# Altium PCB PCB.PcbDoc
Units mil, origin at the board's own origin, x right, y up, seen from the top; angles counter-clockwise.
Board outline 6000 x 4000 mil, 2 copper layers (Top Layer, Bottom Layer); 29 components, 23 nets, 105 pads, 0 vias.
Unrouted connection lines stored in the file: 68.
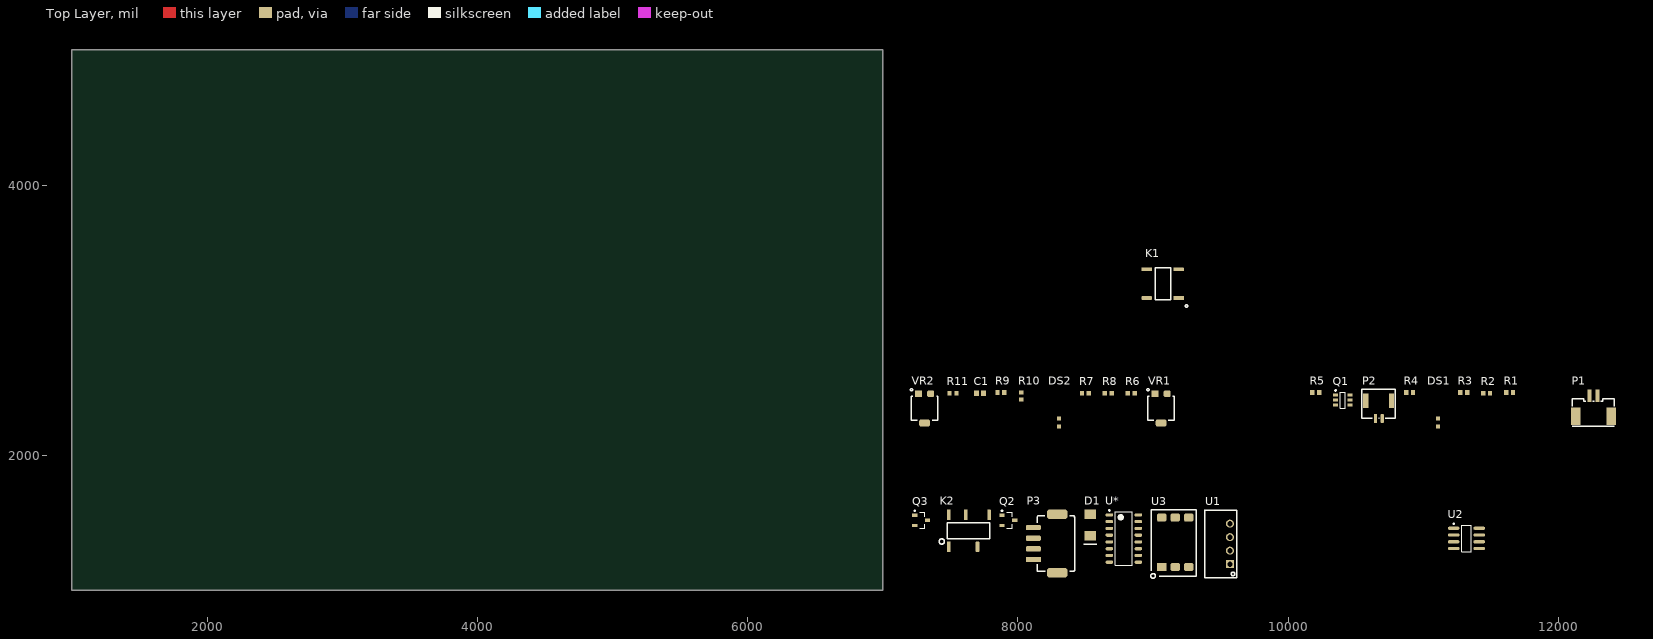
[diagram p0: Top Layer view]
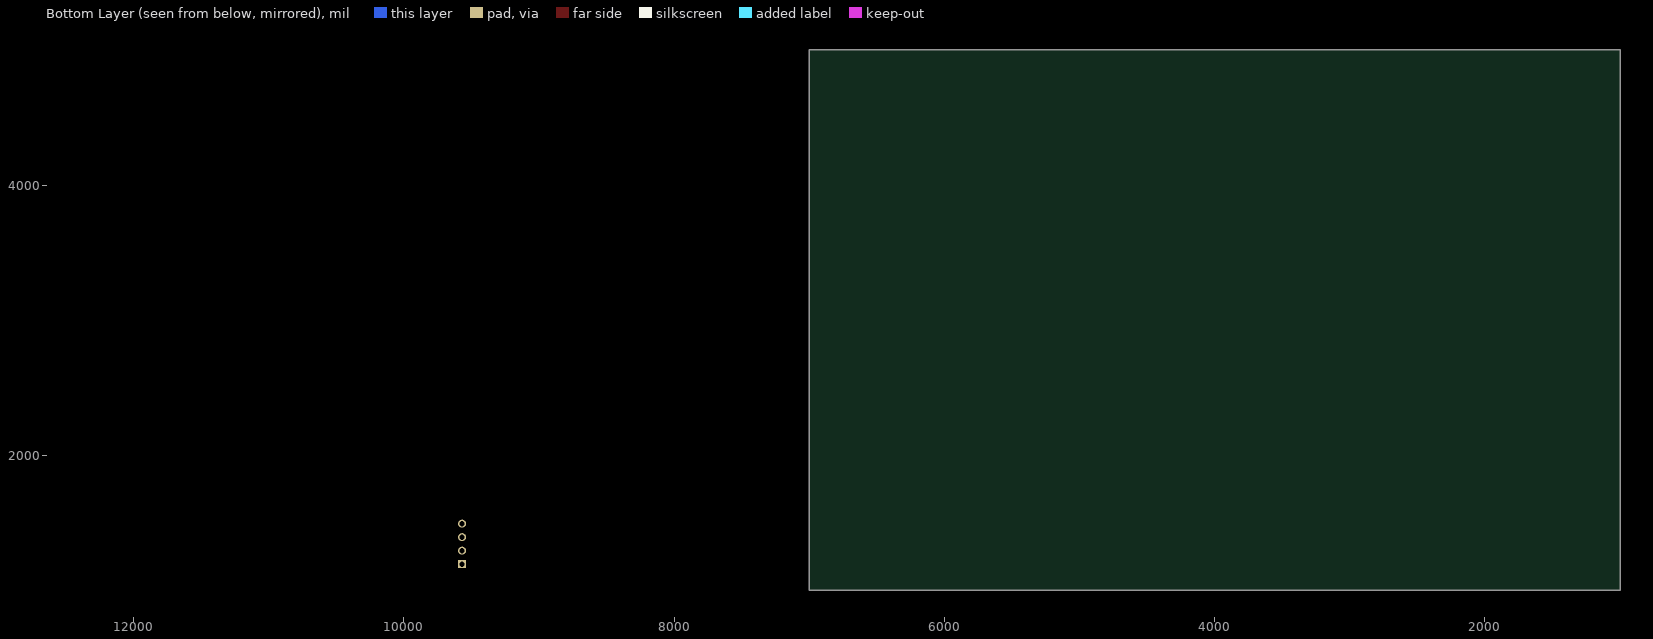
[diagram p1: Bottom Layer view, seen from below]

## Layer stack, top to bottom
Top Solder: solder mask 0.4, Solder Resist, Dk 3.5
Top Layer: signal copper 1.4
Dielectric 1: dielectric 12.6, FR-4, Dk 4.8
Bottom Layer: signal copper 1.4
Bottom Solder: solder mask 0.4, Solder Resist, Dk 3.5

## Board outline
1000,1000 7000,1000 7000,5000 1000,5000

## Design rules (kind name [scope] priority, off if disabled: settings)
Clearance [All] p1: gap=10
PolygonConnect [All] p1: connectstyle=Relief reliefconductorwidth=10 reliefentries=4 polygonreliefangle="90 Angle" airgapwidth=10
RoomDefinition Sheet1 [InComponentClass('Sheet1')] p1: confinementstyle=ConfineIn formatcopy=TRUE lockcomponents=FALSE outline 7200.28,1078.82 12440.28,1078.82 12440.28,2598.82 7200.28,2598.82
RoutingVias [All] p1: holewidth=28 width=50 viastyle="Through Hole" minholewidth=28 minwidth=50 maxholewidth=28 maxwidth=50
SolderMaskExpansion [All] p1: expansion=4
Width [All] p1: maxlimit=10 minlimit=10 preferedwidth=10
30 further rules are at their usual default settings.

## Components (designator, comment, footprint, x,y, rotation, side; value= is the part's Value field where it differs from the comment)
C1 "2.2uF" 0603 7720.28,2458.82 r0 top
D1 "Zener Diode" "DO-214AA Diode" 8535.28,1403.82 r90 top
DS1 "LED_G" LED_0603 11110.28,2213.82 r90 top
DS2 "LED_R" LED_0603 8305.28,2213.82 r90 top
K1 "Relay-SPST" RELAY-SPST 9190.28,3163.82 r90 top
K2 "Relay-SPDT" RELAY_SPDT 7615.28,1558.82 r0 top
P1 "12V Power In" WM9811CT-ND 11975.28,2248.82 r0 top
P2 "To Main Relay" WM4780CT-ND 10660.28,2358.82 r0 top
P3 "4 Position Clik-Mate HV Surface Mount" WM2282CT-ND 8115.28,1228.82 r90 top
Q1 "MOSFET-P" P-MOSFET 10405.28,2408.82 r0 top
Q2 "MOSFET-N" "N-CH MOSFET SOT-23" 7930.28,1518.82 r0 top
Q3 "MOSFET-N" "N-CH MOSFET SOT-23" 7285.28,1518.82 r0 top
R1 "10K" RES_0603 11640.28,2463.82 r0 top
R2 "RES SMD 6.2K OHM 5% 1/10W 0603" RES_0603 11470.28,2458.82 r0 top
R3 "10K" RES_0603 11300.28,2463.82 r0 top
R4 "820 Ohm" RES_0603 10900.28,2463.82 r0 top
R5 "10K" RES_0603 10205.28,2463.82 r0 top
R6 "470K" RES_0603 8840.28,2458.82 r0 top
R7 "33K" RES_0603 8500.28,2458.82 r0 top
R8 "470K" RES_0603 8670.28,2458.82 r0 top
R9 "820 Ohm" RES_0603 7875.28,2463.82 r0 top
R10 "33K" RES_0603 8025.28,2438.82 r90 top
R11 "33K" RES_0603 7520.28,2458.82 r0 top
U1 "RM-1212S DCDC" RM-1212S 9570.28,1193.82 r90 top
U2 "LM311" SOIC8 11320.28,1383.82 r0 top
U3 "H11L1S" H11LS 9265.28,1173.82 r90 top
U* "CD4043B SR Latch" CD4043BDR-16SOIC 8785.28,1383.82 r0 top
VR1 "20k 0.25W Pot" "20K POT" 9060.28,2238.82 r90 top
VR2 "20k 0.25W Pot" "20K POT" 7310.28,2238.82 r90 top

## Footprints (in the part's own frame and the unit in brackets; to place one, negate y for a bottom-side part, rotate by r counter-clockwise, add the part's x,y. Pads: shape width x height; smd on the part's side, far side on the other; paste and mask are expansions set on the pad)
"20K POT" [mm]
  rect 1.3x1.3 smd: 1(5.5,1.15)
  rrect50% 1.3x2 smd: 2(0,0)
  rrect50% 1.3x1.3 smd: 3(5.5,-1.15)
  silkscreen extent 0.5,-2.5 6.46,2.66
0603 [mm] "Chip Capacitor, 2-Leads, Body 1.60x0.81mm, IPC Medium Density"
  rect 0.9x1 smd: 1(-0.675,0) 2(0.675,0)
  body extent -0.87,-0.48 0.87,0.48, height 0.9
CD4043BDR-16SOIC [mm] "SR LATCH"
  oval 1.45x0.6 smd: 1(-2.725,4.445) 2(-2.725,3.175) 3(-2.725,1.905) 4(-2.725,0.635) 5(-2.725,-0.635) 6(-2.725,-1.905) 7(-2.725,-3.175) 8(-2.725,-4.445) 9(2.725,-4.445) 10(2.725,-3.175) 11(2.725,-1.905) 12(2.725,-0.635) 13(2.725,0.635) 14(2.725,1.905) 15(2.725,3.175) 16(2.725,4.445)
  silkscreen extent -2.85,-5 1.6,5.42, body extent -2,-5 2,5, height 1.75
"DO-214AA Diode" [mil] "Zener Diode 16V 5W SMBJ5353B-TP"
  rect 70x85 smd: 1(0,0) 2(160,0)
  silkscreen extent -63,-49 -63,48
H11LS [mm] "Logic Output Optoisolator Open Collector 1080-1201-6-ND"
  rect 1.52x1.78 smd: 1(0,5.08)
  rrect50% 1.52x1.78 smd: 2(0,2.54) 3(0,0) 4(9.27,0) 5(9.27,2.54) 6(9.27,5.08)
  silkscreen extent -2.15,-1.4 10.7,7.15
LED_0603 [mm]
  rect 0.8x0.8 smd: 1(0,0) 2(1.5,0)
"N-CH MOSFET SOT-23" [mm] "SI2318CDS-T1-GE3CT-ND"
  rect 1x0.6 smd: 1(-1.2,0.95) 2(-1.2,-0.95) 3(1.2,0)
  silkscreen extent -1.32,-1.5 0.7,1.92, body extent -0.7,-1.52 0.7,1.52, height 1.12
P-MOSFET [mm] "SOT23, 6-Leads, Body 2.93x2.80mm, Pitch 0.95mm, IPC Medium Density"
  rect 1x0.6 smd: 1(-1.365,0.95) 2(-1.365,0) 3(-1.365,-0.95) 4(1.365,-0.95) 5(1.365,0) 6(1.365,0.95)
  silkscreen extent -1.49,-1.5 0.45,1.92, body extent -1.5,-1.52 1.5,1.52, height 1.25
RELAY-SPST [mm]
  rect 0.7x2 smd: 1(0,0)
  rrect50% 0.7x2 smd: 3(5.4,0) 6(5.4,6) 8(0,6)
  silkscreen extent -1.72,-1.72 5.7,4.4
RELAY_SPDT [mm]
  rect 0.7x2 smd: 1(-3.2,-6)
  rrect50% 0.7x2 smd: 3(2.2,-6) 5(4.4,0) 7(0,0) 8(-3.2,0)
  silkscreen extent -5,-5.5 4.5,-1.5
RES_0603 [mm] "Chip Resistor, 2-Leads, Body 1.60x0.80mm, IPC Medium Density"
  rect 0.8x0.9 smd: 1(-0.65,0) 2(0.65,0)
  body extent -0.85,-0.45 0.85,0.45, height 0.5
RM-1212S [mm]
  rect 1.5x1.5 hole 1: 1(0,0)
  round 1.5 hole 1: 2(2.54,0) 3(5.08,0) 4(7.62,0)
  silkscreen extent -2.55,-1.25 10.2,4.77, body extent -2.68,-1.38 10.33,4.9, height 10
SOIC8 [mm]
  oval 2.2x0.6 smd: 1(-2.394,1.935) 2(-2.394,0.665) 3(-2.394,-0.605) 4(-2.394,-1.875) 5(2.406,-1.875) 6(2.406,-0.605) 7(2.406,0.665) 8(2.406,1.935)
  silkscreen extent -2.52,-2.47 0.91,2.91, body extent -1.99,-2.47 2.01,2.53, height 1.75
WM2282CT-ND [mm] "4 Position 2.0mm Clik-Mate Connectors"
  rrect50% 1.8x3.8 smd: 1(-2.5,-4.5) 1(8.5,-4.5)
  rect 1x2.8 smd: 1(0,0)
  rrect50% 1x2.8 smd: 2(2,0) 3(4,0) 4(6,0)
  silkscreen extent -2.2,-7.8 8.2,-0.7
WM4780CT-ND [mm]
  rect 0.6x1.7 smd: 1(-0.309,-2.207)
  rrect50% 0.6x1.7 smd: 2(0.941,-2.207)
  rect 1x2.8 smd: ""(-2.159,1.143) ""(2.691,1.143)
  silkscreen extent -2.92,-2.16 3.43,3.3
WM9811CT-ND [mm]
  rect 0.8x2.4 smd: 1(6.502,4.866)
  rrect50% 0.8x2.4 smd: 2(8.002,4.866)
  rect 1.8x3.3 smd: ""(3.902,1.016) ""(10.602,1.016)
  silkscreen extent 3.3,-0.89 11.18,4.32

## Part data
C1: library part "CAP CER 2.2UF 25V 10% 0603", "2.2µF ±10% 25V Ceramic Capacitor X5R 0603 (1608 Metric)"
D1: "Zener Diode 16V 5W ±5% Surface Mount DO-214AA (SMB)"
DS1: "Green LED 0603"
DS2: "Red LED 0603"
K1: "Telecom Relay SPST-NO (1 Form A) Surface Mount"
K2: "Telecom Relay SPDT (1 Form C) Surface Mount"
P1: library part "2 Position Clik-Mate 12V Connector", "2 Position Receptacle Connector 0.059\" (1.50mm) Surface Mount Tin"
P2: library part "2 Position Clik-Mate CAN Connector", "2 Position Receptacle Connector 0.049\" (1.25mm) Surface Mount Tin"
P3: "4 Position Receptacle Connector 0.079\" (2.00mm) Surface Mount, Right Angle Tin"
Q1: "MOSFET P-CH 30V 4A SOT23-6"
Q2 Q3: "MOSFET N-CH 50V 200MA SOT23-3"
R1 R3 R5: library part "RES SMD 10K OHM 1% 1/10W 0603", "RES SMD 10K OHM 1% 1/10W 0603"
R4 R9: library part "RES SMD 820 OHM 5% 1/4W 0603", "RES SMD 820 OHM 5% 1/4W 0603"
R6 R8: library part "RES 470K OHM 1% 1/4W 0603", "RES SMD 470K OHM 1% 1/4W 0603"
R7 R10 R11: library part "RES 33K OHM 1% 1/4W 0603", "RES 33K OHM 1% 1/4W 0603"
U3: "OPTOISO 5KV OPEN COLLECTOR 6SMD"
U*: "S-R Latch 4 Channel 1:1 IC Tri-State 16-TSSOP"
VR1 VR2: "20k Ohm 0.25W, 1/4W Gull Wing Surface Mount Trimmer Potentiometer"

## Nets (pads, with @x,y where several pads share a name; then routed paths per layer and width w, separated by ;. In a path a pad name is that pad's centre, name@x,y a point inside that pad or via, vN(x,y) a via of type N, cw(c..) or ccw(c..) an arc to the next point about the centre after c; other vN are vias at no path point)
BAT_IN: K1.3 P3.1
DCDC_IN: Q3.2 U1.2
GND: C1.1 DS2.2 K2.8 P1.2 Q1.4 R5.1 R11.1 U1.1 U2.1 U2.4 U3.2 U3.3 U*.3 U*.4 U*.7 U*.8 U*.11 U*.12 U*.13 U*.14 U*.15 VR2.2 VR2.3
IN+: R6.1 R10.2 U2.2
IN-: R8.1 R11.2 U2.3
ISO_12V: R1.2 R3.2 U1.4 U2.8 U3.6
ISO_GND: U1.3 U3.5
LATCH_IN: U3.4 U*.6
NetC1_2: C1.2 Q3.1 R7.2
NetD1_1: D1.1 DS1.2 P2.2 Q1.1
NetDS1_1: DS1.1 R4.2
NetDS2_1: DS2.1 R9.2
NetK1_1: K1.1 Q2.2 R7.1 R9.1
NetQ1_3: Q1.3 Q2.1 R5.2 U*.9
NetR1_1: R1.1 R2.1 U2.7
NetR2_2: R2.2 U3.1
NetR6_2: R6.2 VR1.2 VR1.3
NetR10_1: R10.1 VR2.1
NetU2_5: U2.5 U2.6
PRECHARGEIN: P3.2 R8.2
PRECHARGEOUT: K2.3 P3.3 VR1.1
"TO DISCHARGE RESISTOR": K2.7 P3.4
VCC: D1.2 K2.1 P1.1 P2.1 Q2.3 Q3.3 R4.1 U*.5 U*.16
pads on no net: K1.6 K1.8 K2.5 P1. P2. Q1.2 Q1.5 Q1.6 R3.1 U*.1 U*.2 U*.10